# EAGLE board untitled (EAGLE 9.4.2)
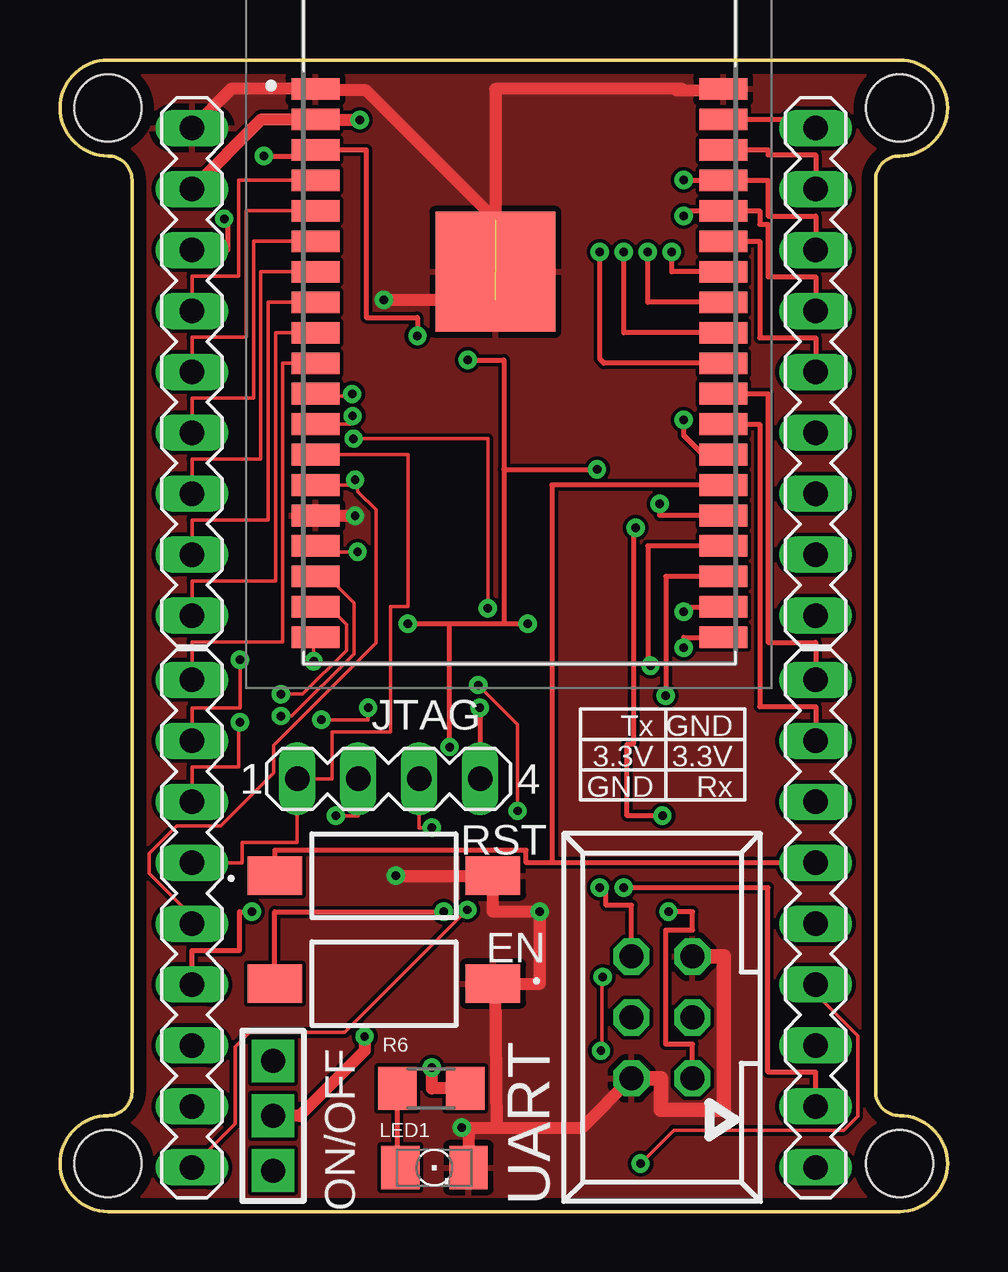
[diagram p0: board, top side]
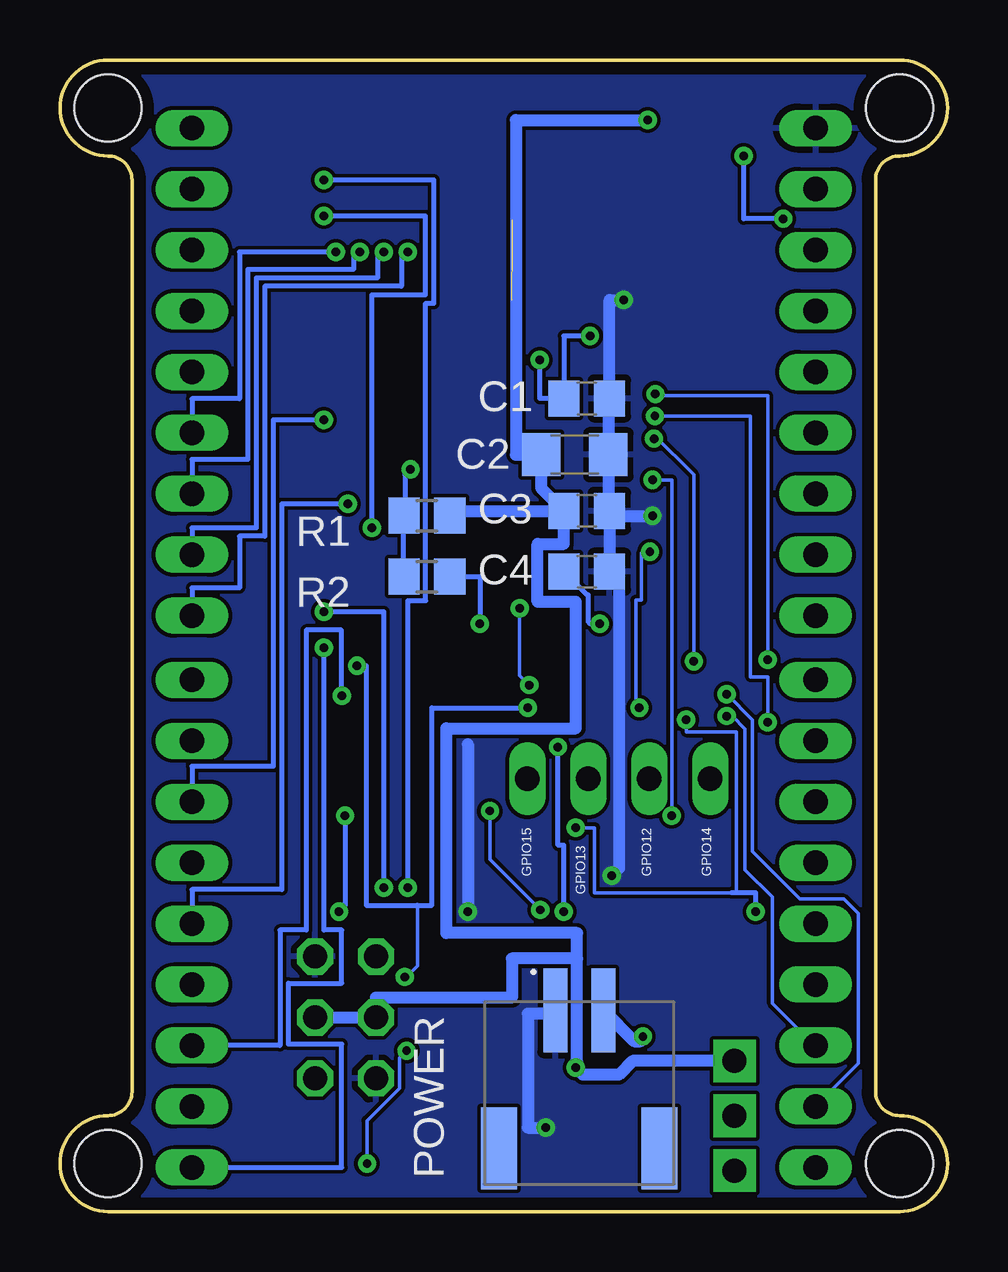
[diagram p1: board, bottom side, seen from below]

Size 37 x 48 mm. Coordinates in mm from the lower left corner, seen from the top.
Outline: 0,2 arc90 2,0 35,0 arc90 37,2 arc90 35,4 arc-90 34,5 34,43 arc-90 35,44 arc90 37,46 arc90 35,48 2,48 arc90 0,46 arc90 2,44 arc-90 3,43 3,5 arc-90 2,4 arc90 0,2
Copper layers (1*16): Top 0.035mm / dielectric 1.5mm / Bottom 0.035mm
Design rules "default *": minimum track width 6mil, minimum drill 0.35mm, track to track 6mil, track to pad 6mil, pad to pad 6mil, via to via 6mil, smd to smd 6mil, copper to edge 20mil, drill to drill 6mil, minimum pad ring 10mil, minimum via ring 8mil, stop-mask expansion 4mil, vias tented up to drill 0mil, thermal gap 10mil
Net classes: 1 other: width 0.2 mm, drill 0.2 mm, clearance 0.1 mm
Holes 2.8 mm at 2,46 35,46 35,2 2,2
bKeepout: area 9.2,35.4 to 9.2,35.5; area 7.2,38.9 to 7.2,38.9; area 9.1,35.3 to 9.3,35.5; area 7.2,38.9 to 7.2,39; area 9.1,35.4 to 9.2,35.6; area 9.2,35.3 to 9.3,35.4; area 7.2,38.9 to 7.3,39; area 9.1,35.5 to 9.2,35.6; area 9.3,35.3 to 9.3,35.4; area 7.2,38.9 to 7.3,39; area 7.3,38.7 to 7.4,38.8; area 9.1,35.6 to 9.2,35.7; 2280 more areas

## Footprints (pad centres in the part's own frame; a part is rotated, then mirrored left to right if it is on the bottom)
C0805 = smd 1.3 x 1.5: 1 -0.95,0; 2 0.95,0
C1206 = smd 1.6 x 1.8: 1 -1.4,0; 2 1.4,0
FSMSM = smd 2.27 x 1.6: 1 -4.55,0; 2 4.55,0
ESP32WROVERIB16MB = smd 2 x 0.9: 1 -7.85,8.26; 2 -7.85,6.99; 3 -7.85,5.72; 4 -7.85,4.45; 5 -7.85,3.18; 6 -7.85,1.91; 7 -7.85,0.64; 8 -7.85,-0.63; 9 -7.85,-1.9; 10 -7.85,-3.17; 11 -7.85,-4.44; 12 -7.85,-5.71; 13 -7.85,-6.98; 14 -7.85,-8.25; 15 -7.85,-9.52; 16 -7.85,-10.79; 17 -7.85,-12.06; 18 -7.85,-13.33; 19 -7.85,-14.6; 20 9.15,-14.6; 21 9.15,-13.33; 22 9.15,-12.06; 23 9.15,-10.79; 24 9.15,-9.52; 25 9.15,-8.25; 26 9.15,-6.98; 27 9.15,-5.71; 28 9.15,-4.44; 29 9.15,-3.17; 30 9.15,-1.9; 31 9.15,-0.63; 32 9.15,0.64; 33 9.15,1.91; 34 9.15,3.18; 35 9.15,4.45; 36 9.15,5.72; 37 9.15,6.99; 38 9.15,8.26 | smd 5 x 5: 39 -0.35,0.64
MA04-1 = drill 1.016 long: 1 -3.81,0; 2 -1.27,0; 3 1.27,0; 4 3.81,0
1206 = smd 1.6 x 1.803: A -1.422,0; C 1.422,0
CON3 = drill 1 pad 1.778 square: P$1 -2.794,0.254; P$2 -0.508,0.254; P$3 1.778,0.254
JST_S2B-PH-SM4-TB = smd 1 x 3.5: 1 1,0; 2 -1,0 | smd 1.5 x 3.4: P1 3.35,5.75; P2 -3.35,5.75
R0805 = smd 1.3 x 1.5: 1 -0.95,0; 2 0.95,0
R1206 = smd 1.6 x 1.803: 1 -1.422,0; 2 1.422,0
MA09-1 = drill 1.016 long: 1 -10.16,0; 2 -7.62,0; 3 -5.08,0; 4 -2.54,0; 5 0,0; 6 2.54,0; 7 5.08,0; 8 7.62,0; 9 10.16,0
057-006-1 = drill 1 octagon: 1 -2.54,-1.27; 2 -2.54,1.27; 3 0,-1.27; 4 0,1.27; 5 2.54,-1.27; 6 2.54,1.27

## Placement (x,y rotation side)
C1  1nF  [C0805]  15.04,33.89 0 bottom
C2  100uF  [C1206]  15.54,31.55 0 bottom
C3  1uF  [C0805]  15.04,29.21 0 bottom
C4  1nF  [C0805]  15.04,26.67 0 bottom
EN  FSMSMTR  [FSMSM]  13.5,9.5 180 top
IC6  ESP32-WROVER-B  [ESP32WROVERIB16MB]  18.5,38.53 0 top
JTAG  1  [MA04-1]  13.7,18.04 0 top
LED1  [1206]  15.61,1.83 0 top
ON/OFF  -CON3  [CON3]  8.62,3.48 270 top
POWER  S2B-PH-SM4-TB  [JST_S2B-PH-SM4-TB]  15.35,8.39 180 bottom
R1  12k  [R0805]  21.7,29.01 0 bottom
R2  460ohm  [R0805]  21.7,26.47 180 bottom
R6  1K  [R1206]  15.48,5.13 0 top
RST  FSMSMTR  [FSMSM]  13.5,14 0 top
SV1  [MA09-1]  31.5,12 270 top
SV2  [MA09-1]  31.5,35 270 top
SV5  [MA09-1]  5.5,35 90 top
SV6  [MA09-1]  5.5,12 90 top
UART  057-006-1  [057-006-1]  25.1,8.09 90 top

## Library data of the parts
C1-C4 = CommonParts; SPICEPREFIX: C
EN RST = FSMSMTR; ALLIED_NUMBER: 70286948; ALLIED_PRICE-STOCK: https://www.alliedelec.com/te-connectivity-fsmsmtr/70286948/; DESCRIPTION: Black Button Tact Switch, SPST 50 mA @ 24 V dc 1.07mm; HEIGHT: mm; MANUFACTURER_NAME: TE Connectivity; MANUFACTURER_PART_NUMBER: FSMSMTR; MOUSER_PART_NUMBER: 506-FSMSMTR; MOUSER_PRICE-STOCK: https://www.mouser.com/Search/Refine.aspx?Keyword=506-FSMSMTR; RS_PART_NUMBER: 1680547; RS_PRICE-STOCK: http://uk.rs-online.com/web/p/products/1680547
IC6 = ESP32-WROVER-B; DESCRIPTION: WiFi Modules (802.11) SMD Module, ESP32-D0WD, 64Mbits PSRAM, 32Mbits SPI flash, PCB Antenna; HEIGHT: mm; MANUFACTURER_NAME: Espressif Systems; MANUFACTURER_PART_NUMBER: ESP32-WROVER-B; MOUSER_PART_NUMBER: 356-ESP32-WROVER-B; MOUSER_PRICE-STOCK: https://www.mouser.com/Search/Refine.aspx?Keyword=356-ESP32-WROVER-B
JTAG = con-lstb; OC_FARNELL: unknown; OC_NEWARK: unknown
LED1 = led
ON/OFF = tango
POWER = S2B-PH-SM4-TB; AVAILABILITY: Unavailable; DESCRIPTION: Socket; wire-board; male; PIN: 2; 2mm; SMT; PH; 100V; 2A; -25÷85°C; MF: JST Sales; MP: S2B-PH-SM4-TB; PACKAGE: None; PRICE: None
R1 R2 = CommonParts
R6 = rcl; SPICEPREFIX: R
SV1 SV2 SV5 SV6 = CommonParts; OC_FARNELL: unknown; OC_NEWARK: unknown
UART = con-panduit; OC_FARNELL: unknown; OC_NEWARK: unknown

## Nets
3.3V: C2.1 C3.1 IC6.2 ON/OFF.P$1 R1.2 R6.2 SV5.8 UART.3 UART.4
CLK: IC6.20 SV1.9
CMD: IC6.19 SV6.1
EN [other]: C1.1 C4.1 EN.2 IC6.3 R1.1 R2.1 R2.2 SV5.7
GND: C1.2 C2.2 C3.2 C4.2 EN.1 IC6.1 IC6.15 IC6.38 IC6.39 LED1.C POWER.1 RST.2 SV5.9 UART.2 UART.5
GPIO12: IC6.14 JTAG.2 SV6.5
GPIO13: IC6.16 JTAG.3 SV6.4
GPIO14: IC6.13 JTAG.1 SV6.6
GPIO15: IC6.23 JTAG.4 SV1.6
IO0 [other]: IC6.25 RST.1 SV1.4
IO2: IC6.24 SV1.5
IO4: IC6.26 SV1.3
IO5: IC6.29 SV2.9
IO18: IC6.30 SV2.8
IO19: IC6.31 SV2.7
IO21: IC6.33 SV2.5
IO22: IC6.36 SV2.2
IO23: IC6.37 SV2.1
IO25: IC6.10 SV6.9
IO26: IC6.11 SV6.8
IO27: IC6.12 SV6.7
IO32: IC6.8 SV5.2
IO33: IC6.9 SV5.1
IO34: IC6.6 SV5.4
IO35: IC6.7 SV5.3
N$1: ON/OFF.P$2 POWER.2
N$14 [other]: LED1.A R6.1
NC_1: IC6.27 SV1.2
NC_2: IC6.28 SV1.1
NC_3: IC6.32 SV2.6
RXD0 [other]: IC6.34 SV2.4 UART.1
SD0: IC6.21 SV1.8
SD1: IC6.22 SV1.7
SD2: IC6.17 SV6.3
SD3: IC6.18 SV6.2
SEN_VN: IC6.5 SV5.5
SEN_VP: IC6.4 SV5.6
TXD0 [other]: IC6.35 SV2.3 UART.6

## Tracks (layer width: path | path; a pad name or v marks a point on that pad's centre or on a via)
3.3V  (via drill 0.35)
  Top 0.508: SV5.8 8.4,45.52 IC6.2 10.65,45.5 v12.5,45.5 | R6.2 15.5,5.13 v15.5,6
  Bottom 0.508: 15.45,10.54 15.45,6.23 15.5,6.23 v15.5,6 15.2,5.7 13.7,5.7 13.13,6.27 ON/OFF.P$1 | 15.45,10.54 18.16,10.54 18.16,8.91 23.83,8.91 UART.4 UART.3 | 15.45,10.54 15.45,11.61 20.89,11.61 20.89,20.14 15.5,20.14 15.5,25.41 17.09,25.41 17.09,27.82 15.99,27.82 C3.1 | C3.1 20.55,29.21 R1.2 | v12.5,45.5 18,45.5 18,31.55 C2.1 16.94,30.16 C3.1
CLK  (via drill 0.35)
  Top 0.2: v26,23.5 26,23.93 IC6.20
  Bottom 0.2: v26,23.5 26,11.73 25.26,11.73 25.26,9.52 27.48,9.52 27.48,6.98 25.26,6.98 25.26,1.84 SV1.9
CMD  (via drill 0.35)
  Top 0.152: v10.58,22.94 10.58,23.93 IC6.19 | v17.84,25.15 17.84,32.22 v12.24,32.22 | v17.44,21.95 19.08,20.3 v19.08,16.7 | v16.98,12.57 11.87,7.47 7.91,7.47 7.3,6.86 7.3,3.66 5.55,1.91 SV6.1
  Bottom 0.152: v10.58,22.94 10.58,30.71 12.24,32.37 v12.24,32.22 | v17.44,21.95 17.84,22.35 v17.84,25.15 | v19.08,16.7 19.08,14.67 v16.98,12.57
EN  (via drill 0.35)
  Top 0.2: v14.9,36.5 14.9,37.27 12.77,37.27 12.77,44.25 IC6.3 10.65,44 v8.5,44 | v17,35.5 18.5,35.5 18.5,30.94 | 18.5,24.5 16.24,24.5 | 16.24,24.5 v14.5,24.5 | 18.5,30.94 18.5,24.5 | v19.5,24.5 18.5,24.5 | SV5.7 7,40.08 7,41.5 6.85,41.5 v6.85,41.38 | EN.2 8.95,12.5 v16,12.5 | v16.24,19.36 16.24,24.5 | 18.5,30.94 v22.39,30.94
  Bottom 0.2: v14.9,36.5 15.99,36.5 C1.1 17,33.89 v17,35.5 | v14.5,24.5 14.9,24.5 14.99,24.59 14.99,25.7 15.03,25.7 C4.1 | R2.1 19.5,26.47 v19.5,24.5 | v6.85,41.38 8.5,41.38 v8.5,44 | v16,12.5 16,15.27 16.23,15.27 16.23,19.5 16.4,19.5 16.4,19.36 v16.24,19.36 | R2.2 22.69,26.52 22.69,28.96 R1.1 22.62,29.03 22.62,30.71 v22.39,30.94
GND  (via drill 0.35)  (2 unrouted)
  Top 0.152: IC6.38 27.65,46.74 | 10.88,46.74 10.88,46.79 IC6.1
  Top 0.508: LED1.C 17.03,3.22 v16.75,3.5 18.23,3.5 | 18.23,3.5 21.78,3.5 UART.2 | 25.72,46.74 26,46.74 | 26,46.74 27.65,46.74 | 18.15,41.35 12.76,46.74 10.88,46.74 10.65,46.74 | IC6.1 7.13,46.79 SV5.9 | 18.15,38 v13.5,38 | v12.3,29 IC6.15 | 18.23,3.5 18.15,9.4 EN.1 20,9.5 v20,12.5 18.05,12.5 RST.2 v14,14 | 26,46.74 25.94,46.8 18.15,46.8 IC6.39
  Top 0.61: UART.2 25.05,5.55 25.05,4.23 27.68,4.23 27.68,10.63 UART.5
  Bottom 0.508: POWER.1 16.49,8.25 17.5,8.25 17.5,3.5 v16.75,3.5 | C3.2 C4.2 13.69,26.27 13.69,14.31 v14,14 | C3.2 14.09,29 v12.3,29 | v13.5,38 14.09,38 C1.2 14.14,33.84 C2.2 14.14,29.26 C3.2 | 20,19.48 v20,12.5
  pour Top: 0,48 0,0 37,0 37,48
  pour Bottom: 0,48 0,0 37,0 37,48
GPIO12  (via drill 0.35)
  Top 0.152: JTAG.2 12.43,16.5 v11.5,16.5 | IC6.14 12.3,30.28 v12.3,30.5 12.43,30 13.17,29.26 13.17,23.7 8.9,19.43 8.9,18.29 6.69,16.08 4.86,16.08 3.72,14.94 3.72,14.1 5.47,12.34 5.47,12.04 SV6.5
  Bottom 0.152: v11.5,16.5 11.5,30.5 v12.3,30.5
GPIO13  (via drill 0.35)
  Top 0.152: IC6.16 10.65,27.5 v12.41,27.5 | v12.85,21 12.85,20.5 v10.89,20.5 | v15.5,16 14.97,16 JTAG.3
  Top 0.2: SV6.4 5.5,10.88 7.48,10.88 7.48,12.5 v8,12.5
  Bottom 0.152: v12.85,21 13,21 13,25.49 12.76,25.49 12.76,27.45 12.7,27.5 v12.41,27.5 | v15.5,16 14.71,16 14.71,13.29 9,13.29 8.8,13.29 8.8,19.99 10.89,19.99 v10.89,20.5
  Bottom 0.2: v8,12.5 8,13.29 9,13.29
GPIO14
  Top 0.152: SV6.6 7.59,14.54 7.59,15.38 9.89,15.38 JTAG.1 11.34,18.04 11.34,19.99 13.79,19.99 13.79,25.21 14.5,25.21 14.5,31.55 IC6.13
GPIO15  (via drill 0.35)
  Top 0.152: v22.62,9.78 22.6,9.75 22.6,6.75 v22.55,6.7 | v24.2,2 25.59,3.39 32.67,3.39 33.25,3.97 33.25,7.33 31.5,9.08 SV1.6
  Top 0.2: IC6.23 24.5,27.74 24.5,22.75 v24.62,22.75 | v17.5,21 17.51,21 JTAG.4
  Bottom 0.152: 22.1,12.77 22.1,10.25 22.6,9.75 v22.62,9.78 | v22.55,6.7 22.84,6.41 22.84,5.14 24.2,3.79 v24.2,2
  Bottom 0.2: v24.62,22.75 24.23,22.75 24.23,12.77 22.1,12.77 21.5,12.77 21.5,21 v17.5,21
IO0
  Top 0.2: SV1.4 20.5,14.54 | 20.5,14.54 19.44,14.54 19.44,15.05 8.95,15.05 RST.1 | IC6.25 20.5,30.28 20.5,14.54
IO2  (via drill 0.35)
  Top 0.2: IC6.24 25,29.01 v25,29.5
  Bottom 0.2: v25,29.5 27.76,29.5 27.76,13.42 31.5,13.42 SV1.5
IO4  (via drill 0.35)
  Top 0.2: IC6.26 26.75,31.55 26.75,31.59 26,32.34 v26,33
  Bottom 0.2: v26,33 28.11,33 28.11,18.55 31.5,18.55 SV1.3
IO5  (via drill 0.35)
  Top 0.2: IC6.29 22.68,35.36 22.5,35.54 v22.5,40
  Bottom 0.2: v22.5,40 22.77,40 22.77,38.56 28.46,38.56 28.46,28.15 29.52,28.15 29.52,26 31.5,26 SV2.9
IO18  (via drill 0.35)
  Top 0.2: IC6.30 23.5,36.63 v23.5,40
  Bottom 0.2: v23.5,40 23.77,40 23.77,38.91 28.82,38.91 28.82,28.5 31.5,28.5 SV2.8
IO19  (via drill 0.35)
  Top 0.2: IC6.31 24.5,37.9 v24.5,40
  Bottom 0.2: v24.5,40 24.77,40 24.77,39.27 29.17,39.27 29.17,31.34 31.5,31.34 SV2.7
IO21
  Top 0.2: IC6.33 29.17,40.44 29.17,36.42 31.5,36.42 SV2.5
IO22
  Top 0.2: IC6.36 29.52,44.25 29.52,44.04 31.5,44.04 SV2.2
IO23
  Top 0.2: IC6.37 31.5,45.52 SV2.1
IO25
  Top 0.152: IC6.10 9.29,35.36 9.29,23.75 5.5,23.75 SV6.9
IO26  (via drill 0.35)
  Top 0.152: SV6.8 5.5,21 7.5,21 v7.5,23 | v12.18,34.08 12.27,33.99 10.65,33.99 IC6.11
  Bottom 0.152: v7.5,23 7.5,34.01 12.11,34.01 v12.18,34.08
IO27  (via drill 0.35)
  Top 0.152: SV6.7 5.5,18.53 7.46,18.53 7.46,20.5 7.5,20.5 v7.5,20.39 | v12.2,33.16 12.1,33.06 12.1,32.82 IC6.12
  Bottom 0.152: v7.5,20.39 7.5,22.29 8.21,22.29 8.21,33.16 v12.2,33.16
IO32
  Top 0.152: IC6.8 8.68,37.9 8.68,28.83 5.5,28.83 SV5.2
IO33
  Top 0.152: IC6.9 8.98,36.63 8.98,26.29 5.5,26.29 SV5.1
IO34
  Top 0.152: IC6.6 8.07,40.44 8.07,33.91 5.5,33.91 SV5.4
IO35
  Top 0.152: IC6.7 8.37,39.17 8.37,31.37 5.5,31.37 SV5.3
N$1  (via drill 0.35)
  Top 0.508: v12.7,7.3 12.7,6.7 9.99,3.99 ON/OFF.P$2
  Bottom 0.508: POWER.2 13.07,7.1 12.8,7.1 12.7,7.2 v12.7,7.3
N$14
  Top 0.2: R6.1 14.08,5.11 14.08,1.98 14.16,1.91 LED1.A
NC_1
  Top 0.2: IC6.27 29.17,32.82 29.17,21.04 31.5,21.04 SV1.2
NC_2
  Top 0.2: IC6.28 29.52,34.09 29.52,23.72 31.5,23.72 SV1.1
NC_3  (via drill 0.35)
  Top 0.2: IC6.32 25.5,39.17 v25.5,40
  Bottom 0.2: v25.5,40 29.52,40 29.52,33.88 31.5,33.88 SV2.6
RXD0  (via drill 0.35)
  Top 0.2: SV2.4 31.5,38.96 29.52,38.96 29.52,41.15 29.17,41.15 29.17,41.71 IC6.34 26,41.71 v26,41.5 | v25.37,12.5 26.37,12.5 26.37,11.73 25.26,11.73 25.26,6.98 26.37,6.98 UART.1 | v24,28.5 23.9,28.4 23.9,19.48 23.64,19.48 23.64,16.5 v25.12,16.5
  Bottom 0.2: v25.37,12.5 25.12,12.75 v25.12,16.5 25.25,16.5 | v24,28.5 24,38.21 21.77,38.21 21.77,41.5 v26,41.5
SD0  (via drill 0.35)
  Top 0.2: SV1.8 31.5,5.8 29.52,5.8 29.52,13.5 v23.5,13.5 | v26,25 26,25.2 IC6.21
  Bottom 0.2: v23.5,13.5 23.5,25 v26,25
SD1  (via drill 0.35)
  Top 0.2: IC6.22 25.25,26.47 v25.25,21.5
  Bottom 0.2: SV1.7 27.83,6.92 27.83,11.73 26.73,11.73 26.73,24.23 25.27,24.23 25.27,21.5 v25.25,21.5
SD2  (via drill 0.35)
  Top 0.152: v9.21,20.65 9.66,20.65 12.25,23.24 12.25,25.38 11.19,26.44 10.65,26.44 IC6.17
  Bottom 0.152: v9.21,20.65 8.98,20.65 8.44,20.12 8.44,14.25 7.3,13.11 7.3,8.69 5.55,6.93 SV6.3
SD3  (via drill 0.35)
  Top 0.152: v9.21,21.57 10.12,21.57 11.95,23.39 11.95,24.46 11.26,25.15 10.65,25.15 IC6.18
  Bottom 0.152: v9.21,21.57 8.14,20.5 8.14,15.01 6.16,13.03 4.33,13.03 3.72,12.42 3.72,6.17 5.47,4.42 SV6.2
SEN_VN
  Top 0.152: IC6.5 7.76,41.71 7.76,36.45 5.5,36.45 SV5.5
SEN_VP
  Top 0.152: IC6.4 7.46,42.98 7.46,38.99 5.5,38.99 SV5.6
TXD0  (via drill 0.35)
  Top 0.2: UART.6 23.83,12.77 22.77,12.77 22.77,13.5 v22.5,13.5 | v26,43 27.65,43 IC6.35 29.52,42.98 29.52,41.5 31.5,41.5 SV2.3
  Bottom 0.2: v26,43 21.41,43 21.41,37.86 21.75,37.86 21.75,25.46 22.5,25.46 v22.5,13.5

## Text on the board
tNames: Tx | GND | 3.3V | 3.3V | GND | Rx | ON/OFF
bNames: GPIO14 | GPIO12 | GPIO15 | GPIO13